# Altium PCB PCB_Wheelchair-Radar_2_2024-08-22.pcbdoc
Units mil, origin at the board's own origin, x right, y up, seen from the top; angles counter-clockwise.
Board outline 4740 x 3815 mil, 2 copper layers (Top Layer, Bottom Layer); 58 components, 58 nets, 247 pads, 88 vias.
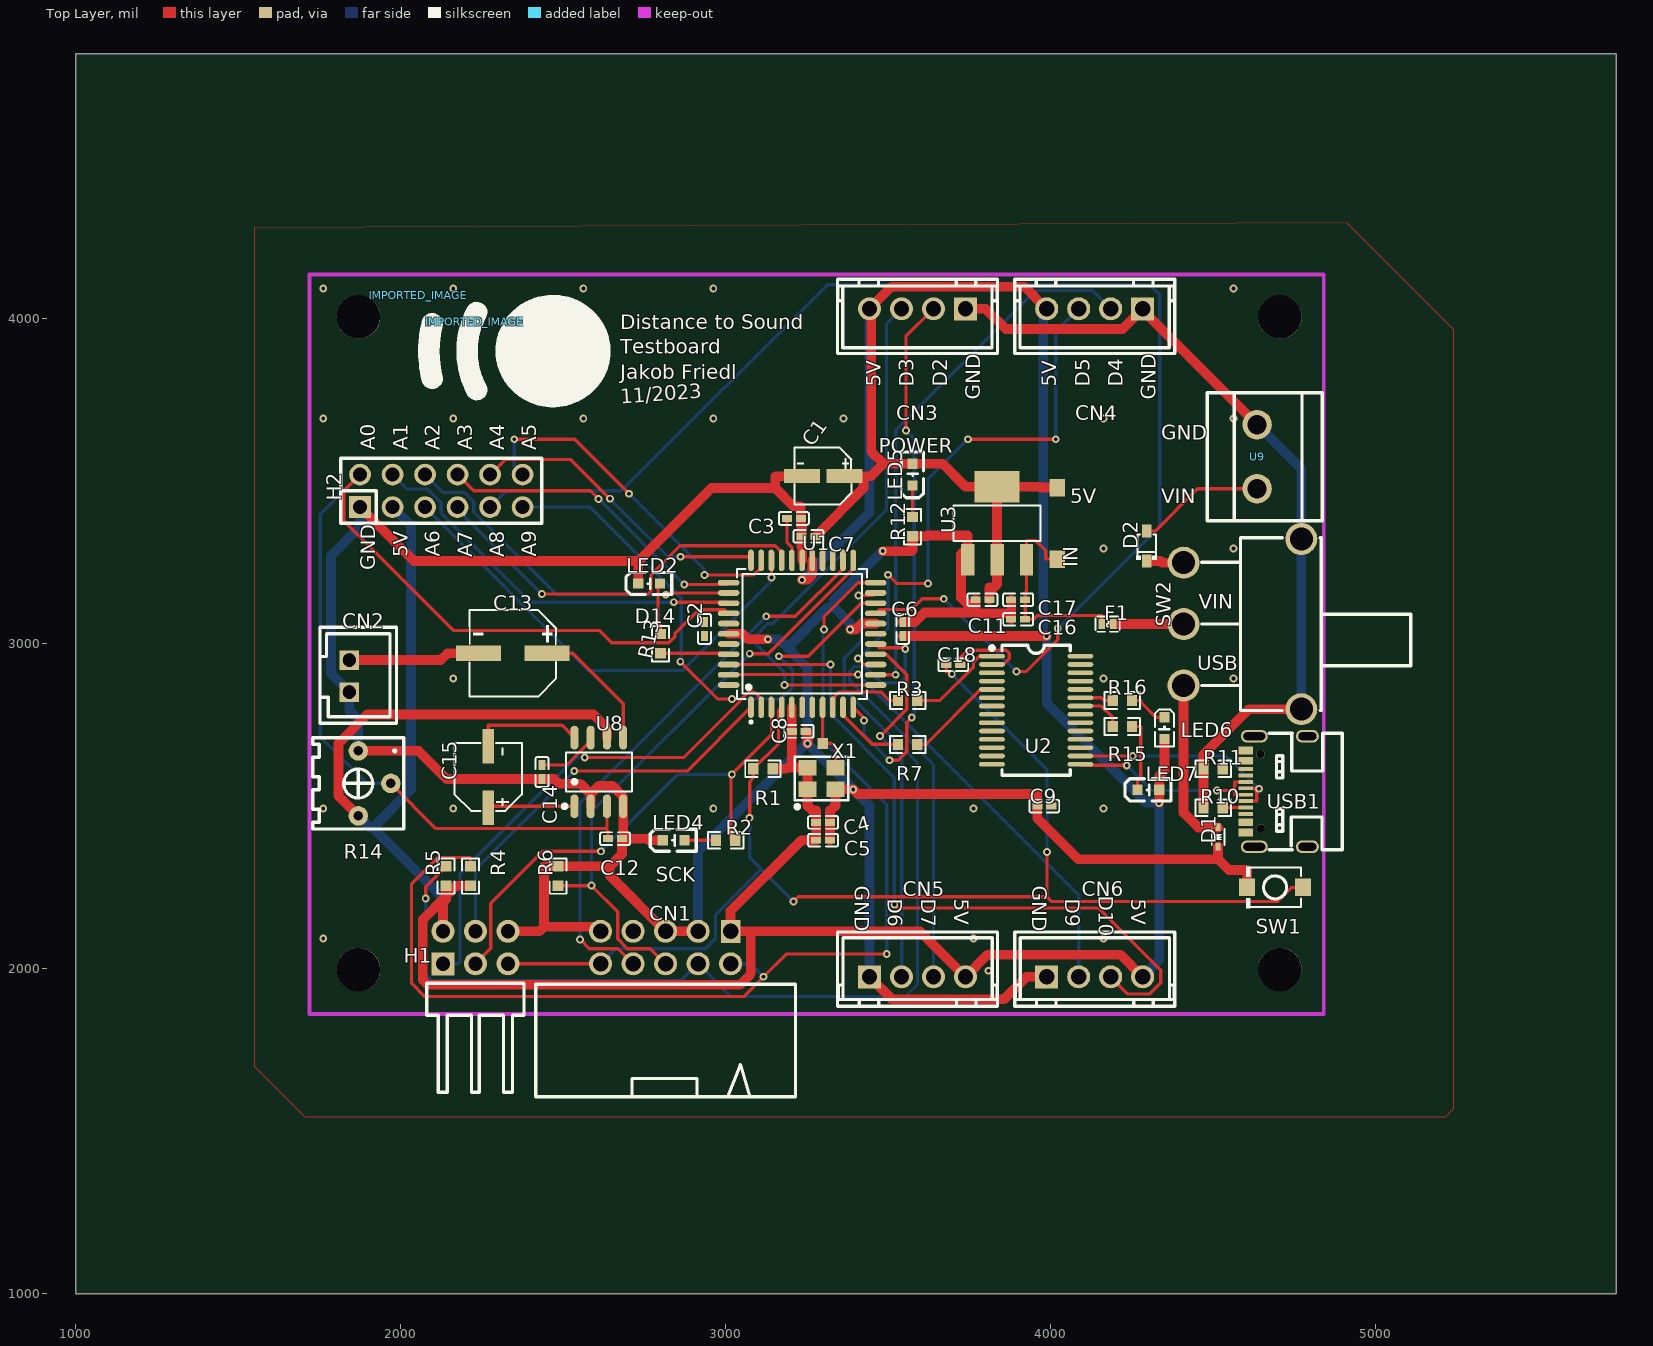
[diagram p0: Top Layer view]
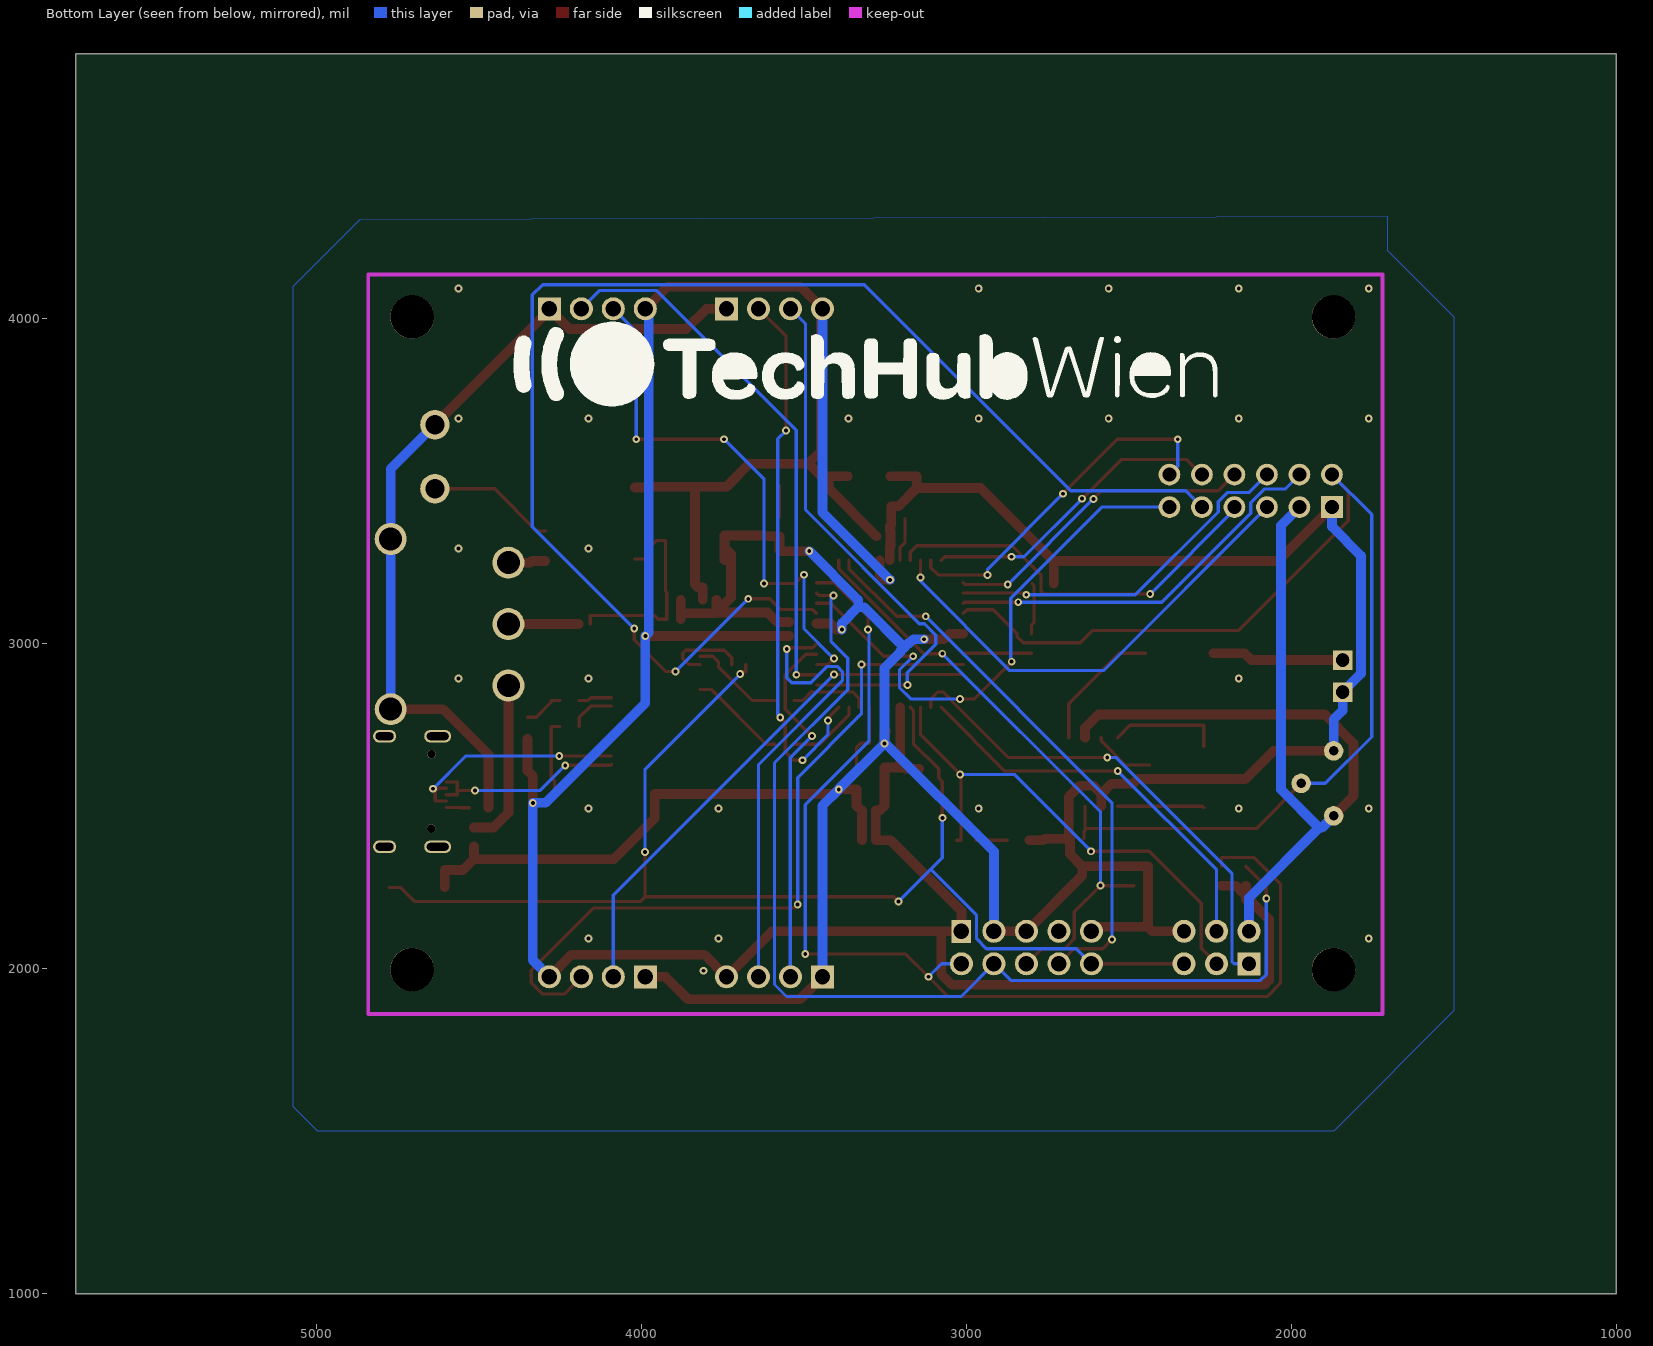
[diagram p1: Bottom Layer view, seen from below]

## Layer stack, top to bottom
Top Layer: signal copper (thickness not stored)
Dielectric: dielectric 12.6, FR-4, Dk 4.8
Bottom Layer: signal copper (thickness not stored)

## Board outline
5740,1000 1000,1000 1000,4815 5740,4815

## Components (designator, comment, footprint, x,y, rotation, side; value= is the part's Value field where it differs from the comment)
C1 "4.7uF" CAP-SMD_BD4.0-L4.3-W4.3-FD 3299.64,3515 r180 top
C2 "1uF" C0402 2934.64,3045 r90 top
C3 "100nF" C0402 3209.64,3385 r180 top
C4 "10uF" C0402 3299.64,2450 r180 top
C5 "100nF" C0402 3299.64,2395 r180 top
C6 "1uF" C0402 3544.64,3045 r270 top
C7 "1uF" C0402 3254.64,3330 r0 top
C8 "1uF" C0402 3224.64,2730 r180 top
C9 "100nF" C0402 3980,2500 r0 top
C11 "1uF" C0402 3789.64,3135 r0 top
C12 "100nF" C0402 2659.64,2400 r180 top
C13 "220uF" CAP-SMD_BD6.3-L6.6-W6.6-FD 2344.64,2970 r180 top
C14 "100nF" C0402 2434.64,2605 r90 top
C15 "10uF" CAP-SMD_BD5.0-L5.3-W5.3-LS6.3-FD 2269.64,2590 r90 top
C16 "100nF" C0402 3899.64,3075 r0 top
C17 "1uF" C0402 3899.64,3135 r0 top
C18 "100nF" C0402 3700,2935 r0 top
CN1 "300R-10P" IDC-TH_300R-10P 2815,2065 r180 top
CN2 "WAFER-XH2.54-2PZZ" CONN-TH_XH2.54-2P 1842.14,2900 r270 top
CN3 "XH-4AK" CONN-TH_XH-4AK 3590,4030 r180 top
CN4 "XH-4AK" CONN-TH_XH-4AK 4135,4030 r180 top
CN5 "XH-4AK" CONN-TH_XH-4AK 3590,1975 r0 top
CN6 "XH-4AK" CONN-TH_XH-4AK 4135,1975 r0 top
D1 "LESD5D5.0CT1G" SOD-523_L1.2-W0.8-LS1.6-BI 4514.64,2405 r90 top
D2 "1N5819WS" SOD-323_L1.8-W1.3-LS2.5-RD 4295,3300 r90 top
F1 "JFC0402-0500FS" F0402 4174.64,3060 r0 top
H1 "PZ254-2-03-W-8.5" HDR-TH_6P-P2.54-H-M-R2-C3-S2.54-W12.3-N 2230,2065 r0 top
H2 "PM254V-12-12-H85" HDR-TH_12P-P2.54-V-F-R2-C6-S2.54 2125,3470 r0 top
IMPORTED_IMAGE "IMPORTED_IMAGE" IMPORTED_IMAGE 2227.32,3989.76 r0 top
IMPORTED_IMAGE "IMPORTED_IMAGE" IMPORTED_IMAGE 2054.78,4072.34 r0 top
LED2 "SZYY0603W" LED0603-R-RD_WHITE 2764.64,3185 r0 top
LED4 "SZYY0603Y" LED0603-R-RD-YELLOW 2839.64,2395 r0 top
LED5 "SZYY0603G" LED0603-R-RD_GREEN 3574.64,3520 r90 top
LED6 "R" LED0603-R-RD 4350,2740 r270 top
LED7 "G" LED0603-R-RD_GREEN 4300,2550 r0 top
R1 "1kΩ" R0603 3114.64,2615 r180 top
R2 "1kΩ" R0603 2999.64,2395 r0 top
R3 "1kΩ" R0603 3559.64,2825 r0 top
R4 "10kΩ" R0603 2214.64,2285 r90 top
R5 "10kΩ" R0603 2139.64,2285 r90 top
R6 "10kΩ" R0603 2484.64,2285 r90 top
R7 "1kΩ" R0603 3559.64,2690 r0 top
R10 "5.1kΩ" R0603 4499.64,2495 r0 top
R11 "5.1kΩ" R0603 4499.64,2615 r0 top
R12 "1kΩ" R0603 3574.64,3360 r90 top
R13 "1kΩ" R0603 2799.64,3000 r270 top
R14 "10kΩ" RES-ADJ-TH_3362P 1919.64,2570 r270 top
R15 "1kΩ" R0603 4220,2745 r0 top
R16 "1kΩ" R0603 4220,2825 r0 top
SW1 "TS-1088-AR02016" SW-SMD_L3.9-W3.0-P4.45 4690,2250 r180 top
SW2 "SS-12D11L7" SW-TH_XKB_SS-12D11L7 4589.64,3060 r90 top
U1 "ATMEGA32A-AU" TQFP-44_L10.0-W10.0-P0.80-LS12.0-BL 3235,3030 r0 top
U2 "FT232RL-REEL" SSOP-28_L10.2-W5.3-P0.65-LS7.8-BL 3955,2795 r270 top
U3 "AZ1117CH-5.0TRG1" SOT-223_L6.5-W3.5-P2.30-LS7.0-BR 3834.64,3370 r270 top
U8 "LM386G-S08-R" SOP-8_L4.9-W3.9-P1.27-LS6.0-BL 2609.64,2605 r0 top
U9 "XY126V-5.0-2P" CONN-TH_XY126V-5.0-2P 4634.64,3575 r90 top
USB1 "TYPEC-304-ACP16" USB-C-SMD_TYPE-C-16P-1 4694.64,2545 r90 top
X1 "16MHz" OSC-SMD_4P-L3.2-W2.5-BL_SIT8008BI 3294.64,2585 r0 top

## Footprints (in the part's own frame and the unit in brackets; to place one, negate y for a bottom-side part, rotate by r counter-clockwise, add the part's x,y. Pads: shape width x height; smd on the part's side, far side on the other; paste and mask are expansions set on the pad)
C0402 [mm]
  rect 0.79x0.54 smd paste-100 mask+0.051: 1(-0.545,0) 2(0.545,0)
  silkscreen extent -1.17,-0.5 1.17,0.5
CAP-SMD_BD4.0-L4.3-W4.3-FD [mm]
  rect 2.8x1.1 smd paste+0 mask+0.051: 1(-1.66,0) 2(1.66,0)
  silkscreen extent -2.22,-2.23 2.24,2.23
CAP-SMD_BD5.0-L5.3-W5.3-LS6.3-FD [mm]
  rect 2.7x0.91 smd paste+0 mask+0.051: 1(-2.4,0) 2(2.4,0)
  silkscreen extent -2.66,-2.62 2.66,2.65
CAP-SMD_BD6.3-L6.6-W6.6-FD [mm]
  rect 3.5x1.2 smd paste+0 mask+0.051: 1(-2.67,0) 2(2.67,0)
  silkscreen extent -3.38,-3.38 3.38,3.38
CONN-TH_XH2.54-2P [mil]
  rect 60x60 hole 39.37 slot 41.34 at 0 deg paste+0 mask+1.97: 1(-49.22,0) 2(49.21,0)
  silkscreen extent -150,-90 145,145
CONN-TH_XH-4AK [mm]
  rect 1.8x1.8 hole 1.2 paste+0 mask+0.051: 1(-3.75,0)
  round 1.8 hole 1.2 paste+0 mask+0.051: 2(-1.25,0) 3(1.25,0) 4(3.75,0)
  silkscreen extent -6.25,-2.3 6.25,3.5
CONN-TH_XY126V-5.0-2P [mm]
  round 2.3 hole 1.5 paste+0 mask+0.051: 1(-2.5,0) 2(2.5,0)
  silkscreen extent -5,-5.1 5,3.9
F0402 [mm]
  rect 0.5x0.8 smd paste+0 mask+0.051: 1(-0.45,0) 2(0.45,0)
  silkscreen extent -0.95,-0.6 0.95,0.6
HDR-TH_6P-P2.54-H-M-R2-C3-S2.54-W12.3-N [mm]
  rect 1.778x1.8 hole 1.1 paste+0 mask+0.051: 1(-2.54,-1.27)
  round 1.8 hole 1.1 paste+0 mask+0.051: 2(-2.54,1.27) 3(0,-1.27) 4(0,1.27) 5(2.54,-1.27) 6(2.54,1.27)
  silkscreen extent -3.8,-11.3 3.8,-2.8
HDR-TH_12P-P2.54-V-F-R2-C6-S2.54 [mm]
  rect 1.7x1.7 hole 1.1 paste+0 mask+0.051: 1(-6.35,-1.27)
  round 1.7 hole 1.1 paste+0 mask+0.051: 2(-6.35,1.27) 3(-3.81,-1.27) 4(-3.81,1.27) 5(-1.27,-1.27) 6(-1.27,1.27) 7(1.27,-1.27) 8(1.27,1.27) 9(3.81,-1.27) 10(3.81,1.27) 11(6.35,-1.27) 12(6.35,1.27)
  silkscreen extent -7.85,-2.54 7.85,2.54
IDC-TH_300R-10P [mm]
  rect 1.524x1.8 hole 1.2 paste+0 mask+0.051: 1(-5.08,-1.27)
  round 1.8 hole 1.2 paste+0 mask+0.051: 2(-5.08,1.27) 3(-2.54,-1.27) 4(-2.54,1.27) 5(0,-1.27) 6(0,1.27) 7(2.54,-1.27) 8(2.54,1.27) 9(5.08,-1.27) 10(5.08,1.27)
  silkscreen extent -10.15,2.87 10.15,11.68
IMPORTED_IMAGE [mil]
LED0603-R-RD [mm]
  rect 0.8x0.8 smd paste+0 mask+0.051: 1(0.851,0) 2(-0.851,0)
  silkscreen extent -1.44,-0.75 1.44,0.75
LED0603-R-RD-YELLOW [mm]
  rect 0.8x0.8 smd paste+0 mask+0.051: 1(0.851,0) 2(-0.851,0)
  silkscreen extent -1.82,-0.86 1.77,0.86
LED0603-R-RD_GREEN [mm]
  rect 0.8x0.8 smd paste+0 mask+0.051: 1(0.851,0) 2(-0.851,0)
  silkscreen extent -1.82,-0.86 1.77,0.86
LED0603-R-RD_WHITE [mm]
  rect 0.8x0.8 smd paste+0 mask+0.051: 1(0.851,0) 2(-0.851,0)
  silkscreen extent -1.82,-0.86 1.77,0.86
OSC-SMD_4P-L3.2-W2.5-BL_SIT8008BI [mm]
  rect 1.4x1.2 smd paste+0 mask+0.051: 1(-1.1,-0.85) 2(1.1,-0.85) 3(1.1,0.85) 4(-1.1,0.85)
  silkscreen extent -2.1,-2.35 2.1,1.7
R0603 [mil]
  rect 31.75x34.02 smd paste-3937.01 mask+2: 1(-29.66,0) 2(29.65,0)
  silkscreen extent -55,-26 55,26
RES-ADJ-TH_3362P [mil]
  round 60 hole 30 paste+0 mask+2: 1(-100,-50) 2(0,50) 3(100,-50)
  silkscreen extent -140,-190 140,90
SOD-323_L1.8-W1.3-LS2.5-RD [mm]
  rect 1x0.75 smd paste+0 mask+0.051: 1(-1.173,0) 2(1.173,0)
  silkscreen extent -1.08,-0.8 0.9,0.8
SOD-523_L1.2-W0.8-LS1.6-BI [mm]
  rect 0.6x0.4 smd paste+0 mask+0.051: 1(-0.75,0) 2(0.75,0)
  silkscreen extent -0.65,-0.5 0.65,0.5
SOP-8_L4.9-W3.9-P1.27-LS6.0-BL [mm]
  oval 0.63x1.865 smd paste+0 mask+0.051: 1(-1.905,-2.682) 2(-0.635,-2.682) 3(0.635,-2.682) 4(1.905,-2.682) 5(1.905,2.682) 6(0.635,2.682) 7(-0.635,2.682) 8(-1.905,2.682)
  silkscreen extent -2.82,-2.83 2.58,1.52
SOT-223_L6.5-W3.5-P2.30-LS7.0-BR [mm]
  rect 2.465x1.05 smd paste+0 mask+0.051: 1(2.858,-2.3) 2(2.857,0) 3(2.857,2.3)
  rect 2.465x3.54 smd paste+0 mask+0.051: 4(-2.857,0)
  silkscreen extent -1.4,-3.4 1.4,3.4
SSOP-28_L10.2-W5.3-P0.65-LS7.8-BL [mm]
  oval 0.364x2.015 smd paste+0 mask+0.051: 1(-4.225,-3.455) 2(-3.575,-3.455) 3(-2.925,-3.455) 4(-2.275,-3.455) 5(-1.625,-3.455) 6(-0.975,-3.455) 7(-0.325,-3.455) 8(0.325,-3.455) 9(0.975,-3.455) 10(1.625,-3.455) 11(2.275,-3.455) 12(2.925,-3.455) 13(3.575,-3.455) 14(4.225,-3.455) 15(4.225,3.455) 16(3.575,3.455) 17(2.925,3.455) 18(2.275,3.455) 19(1.625,3.455) 20(0.975,3.455) 21(0.325,3.455) 22(-0.325,3.455) 23(-0.975,3.455) 24(-1.625,3.455) 25(-2.275,3.455) 26(-2.925,3.455) 27(-3.575,3.455) 28(-4.225,3.455)
  silkscreen extent -5.08,-3.6 5.08,2.67
SW-SMD_L3.9-W3.0-P4.45 [mm]
  rect 1.23x1.36 smd paste+0 mask+0.051: 1(-2.185,0) 2(2.185,0)
  silkscreen extent -2.03,-1.62 2.25,1.62
SW-TH_XKB_SS-12D11L7 [mm]
  round 2.5 hole 1.8 paste+0 mask+0.051: 1(-4.8,4.6) 2(0,4.6) 3(4.8,4.6) 4(6.65,-4.6) 5(-6.65,-4.6)
  silkscreen extent -6.75,-13.15 6.75,3.17
TQFP-44_L10.0-W10.0-P0.80-LS12.0-BL [mm]
  oval 0.448x1.684 smd paste+0 mask+0.051: 1(-4,-5.742) 2(-3.2,-5.742) 3(-2.4,-5.742) 4(-1.6,-5.742) 5(-0.8,-5.742) 6(0,-5.742) 7(0.8,-5.742) 8(1.6,-5.742) 9(2.4,-5.742) 10(3.2,-5.742) 11(4,-5.742) 23(4,5.742) 24(3.2,5.742) 25(2.4,5.742) 26(1.6,5.742) 27(0.8,5.742) 28(0,5.742) 29(-0.8,5.742) 30(-1.6,5.742) 31(-2.4,5.742) 32(-3.2,5.742) 33(-4,5.742)
  oval 1.684x0.448 smd paste+0 mask+0.051: 12(5.742,-4) 13(5.742,-3.2) 14(5.742,-2.4) 15(5.742,-1.6) 16(5.742,-0.8) 17(5.742,0) 18(5.742,0.8) 19(5.742,1.6) 20(5.742,2.4) 21(5.742,3.2) 22(5.742,4) 34(-5.742,4) 35(-5.742,3.2) 36(-5.742,2.4) 37(-5.742,1.6) 38(-5.742,0.8) 39(-5.742,0) 40(-5.742,-0.8) 41(-5.742,-1.6) 42(-5.742,-2.4) 43(-5.742,-3.2) 44(-5.742,-4)
  silkscreen extent -5.08,-6.98 5.08,5.08
USB-C-SMD_TYPE-C-16P-1 [mm]
  rect 0.6x1.15 smd paste-100 mask+0.05: A1B12(-3.2,2.41) A4B9(-2.4,2.41) B1A12(3.2,2.41) B4A9(2.4,2.41)
  rect 0.3x1.15 smd paste-100 mask+0.05: A5(-1.25,2.41) A6(-0.25,2.41) A7(0.25,2.41) A8(1.25,2.41) B5(1.75,2.41) B6(0.75,2.41) B7(-0.75,2.41) B8(-1.75,2.41)
  oval 1x1.8 hole 0.6 slot 1.4 at 90 deg paste+0 mask+0.05: EP(-4.32,-2.41) EP(4.32,-2.41)
  oval 1x2.1 hole 0.6 slot 1.7 at 90 deg paste+0 mask+0.05: EP(-4.32,1.74) EP(4.32,1.74)
  round 0.65 hole 0.65 unplated paste+0: ""(-2.9,1.24) ""(2.9,1.25)
  silkscreen extent -4.55,-5.14 4.55,0.59

## Free pads (board coordinates)
  rect 31.75x34.02 smd paste-3937.01 mask+2: 1(3297.99,2693.04)
  rect 48.42x53.54 smd paste+0 mask+2: 2(4020,3480) 3(4020,3260)
  round 133.86 hole 133.86 unplated paste+0: ""(1870,1997.13) ""(1870,4005) ""(4704.64,1997.13) ""(4704.64,4005)

## Via types
v1: diameter 24.02, hole 12.01, Top Layer to Bottom Layer, tented both sides, 88 vias

## Nets (pads, with @x,y where several pads share a name; then routed paths per layer and width w, separated by ;. In a path a pad name is that pad's centre, name@x,y a point inside that pad or via, vN(x,y) a via of type N, cw(c..) or ccw(c..) an arc to the next point about the centre after c; other vN are vias at no path point)
3V3: C9.2 U2.17
+5V: C1.1 C2.2 C4.2 C5.2 C6.2 C7.2 C8.2 C11.2 CN1.1 CN3.4 CN4.4 CN5.4 CN6.4 H1.2 H2.3 LED5.1 LED6.1 LED7.1 pad.2 R1.1 R4.1 R5.1 R14.3 U1.5 U1.17 U1.27 U1.38 U2.4 U2.20 U3.2 U3.4 U8.6 X1.1 X1.4 | length 13007.7
  Top Layer w29.92: R14.3 1808.61,2531.03 1808.61,2693.28 1897,2781.67 2593.33,2781.67 2634.64,2740.36 U8.6 ; H1.2 2130,2203.04 2139.64,2212.68 2139.64,2223.35 ; R5.1 2139.64,2234.01 ; R4.1 2170.84,2255.34 2149.51,2234.01 2139.64,2234.01 ; R1.1 3186.96,2615 3190.43,2618.47 3203.18,2618.47 ; U1.5 3203.5,2745.04 3203.5,2730.32 C8.2 3203.18,2618.47 ; v1(3234.67,3196.11) 3249.73,3196.11 3266.5,3212.88 U1.27 ; C7.2 3424.14,3478.04 3424.14,3515 ; C1.1 3424.14,3515 ; CN3.4 CN3.4@3447.58,4035.22 ; C6.2 v1(3987.36,3023.54) ; C11.2 3811.1,3172.42 3824.87,3172.42 3834.64,3182.19 3834.64,3219.85 U3.2 U3.4 ; CN4.4 3919.21,4098.15 3510.51,4098.15 CN3.4@3447.58,4035.22 ; pad.2 3969,3480 3966.5,3482.5 U3.4 ; CN6.4 4214.58,2043.06 3805.7,2043.06 CN5.4 3597.64,2115 3071.79,2115 ; v1(4333.5,2510.07) LED7.1 4333.5,2592.54 4350,2609.04 LED6.1 ; 2139.64,2223.35 2068.2,2151.91 2068.2,1965.22 2083.11,1950.31 3043.32,1950.31 3077.27,1984.26 3077.27,2109.52 3071.79,2115 ; 2139.64,2223.35 2139.64,2234.01 ; 3071.79,2115 CN1.1 3015,2177.22 3232.78,2395 C5.2 C4.2 3278.18,2487.42 3265.04,2487.42 3251.33,2501.13 X1.1 X1.4 3203.18,2618.47 ; 3424.14,3515 3446.92,3515 3485.42,3553.5 ; CN3.4@3447.58,4035.22 3447.58,3591.34 3485.42,3553.5 ; 3485.42,3553.5 LED5.1 3667.17,3553.5 3738.17,3482.5 3812.14,3482.5 U3.4
  Bottom Layer w29.92: R14.3 1906.19,2433.45 1914.2,2433.45 ; H2.3 2031.87,3363.13 2031.87,2551.12 1914.2,2433.45 ; H1.2 2130,2217.65 1914.2,2433.45 ; v1(3234.67,3196.11) 3442.36,3403.8 CN3.4 ; CN4.4 3976.59,4019.23 3976.59,3034.31 v1(3987.36,3023.54) 3987.36,2816.95 4294.24,2510.07 v1(4333.5,2510.07) 4333.5,2025.86 CN6.4
A0: C12.2 H2.2 R14.2 U1.37 U8.3 | length 3512.7
  Top Layer w10: H2.2 1824.7,3469.7 1824.7,3378.23 2162.36,3040.57 2611.03,3040.57 2648.88,3002.72 2824.8,3002.72 2844.09,3022.01 2844.09,3031.63 2916.91,3104.45 2997.48,3104.45 U1.37 ; R14.2 2108.58,2431.06 2634.64,2431.06 ; U8.3 2634.64,2431.06 ; C12.2 2638.18,2421.62 2634.64,2425.16 2634.64,2431.06
  Bottom Layer w10: H2.2 1752.42,3397.42 1752.42,2712.7 1895.12,2570 R14.2
A1: H2.4 U1.36 | length 1217.3
  Top Layer w10: v1(2839.97,3127.36) 3006.07,3127.36 U1.36
  Bottom Layer w10: H2.4 2019.52,3475.48 2083.29,3475.48 2125,3433.77 2125,3400.7 2398.5,3127.2 2839.81,3127.2 v1(2839.97,3127.36)
A2: H2.6 U1.35 | length 1108
  Top Layer w10: v1(2815.49,3150.27) 2821.2,3155.98 U1.35
  Bottom Layer w10: H2.6 2130.48,3464.52 2196.88,3464.52 2225,3436.4 2225,3404.77 2479.5,3150.27 v1(2815.49,3150.27)
A3: H2.8 U1.34 | length 976.5
  Top Layer w10: H2.8 2224.96,3470.04 2583.94,3470.04 v1@2608.85,3445.13 ; v1(2872.31,3181.67) 3003.13,3181.67 U1.34
  Bottom Layer w10: v1@2608.85,3445.13 v1(2872.31,3181.67)
  other v1: 2608.85,3445.13
A4: H2.10 U1.33 | length 950
  Top Layer w10: H2.10 2321.06,3566.06 2523.56,3566.06 v1(2643.75,3445.87) ; v1(2860.96,3267.24) 3066.34,3267.24 U1.33
  Bottom Layer w10: v1(2643.75,3445.87) 2822.38,3267.24 v1(2860.96,3267.24)
A5: H2.12 U1.32 | length 1094
  Top Layer w10: v1(2349.29,3628.63) 2535,3628.63 v1(2702.71,3460.92) ; v1(2934.48,3211.28) 3086.64,3211.28 3109.02,3233.66 U1.32
  Bottom Layer w10: v1(2349.29,3628.63) 2349.29,3545.71 H2.12 ; v1(2702.71,3460.92) 2934.48,3229.15 v1(2934.48,3211.28)
A6: H2.5 U1.31 | length 1452
  Top Layer w10: v1(3140.51,3203.76) U1.31
  Bottom Layer w10: H2.5 2577.87,2917.13 2866.11,2917.13 3140.51,3191.53 v1(3140.51,3203.76)
A7: H2.7 U1.30 | length 1236.2
  Top Layer w10: v1(2434.19,3152.41) 2760.82,3152.41 2770.34,3161.93 2770.34,3211.7 2859.32,3300.68 3151.9,3300.68 3172.01,3280.57 U1.30
  Bottom Layer w10: H2.7 2175,3411.6 v1(2434.19,3152.41)
A8/SCL: H2.9 U1.19 | length 4259.7
  Top Layer w10: U1.19 3472.68,3104.61 3570.89,3104.61 3603.99,3137.71 v1(3670.75,3137.71) ; v1(3894.64,2913.82) 3923.69,2913.82 4021.42,3011.55 v1(4021.42,3046.15)
  Bottom Layer w10: H2.9 2325,3470 2679.19,3470 3313.48,4104.29 4303.59,4104.29 4334.91,4072.97 4334.91,3359.64 v1(4021.42,3046.15) ; v1(3670.75,3137.71) v1(3894.64,2913.82)
A9/SDA: H2.11 U1.20 | length 1687.2
  Top Layer w10: v1(2860.26,2944.3) 2974.71,2829.85 v1(3019,2829.85) ; v1(3163.35,2961.14) 3253.96,2961.14 3417.31,3124.49 U1.20
  Bottom Layer w10: H2.11 2582.79,3420 2863.03,3139.76 2863.03,2947.07 v1(2860.26,2944.3) ; v1(3019,2829.85) 3171.17,2829.85 3205.33,2864.01 3205.33,2919.16 v1(3163.35,2961.14)
AREF: C3.2 U1.29 | length 135.3
  Top Layer w10: C3.2 3188.18,3311.61 3203.5,3296.29 U1.29
D0/RX: R3.1 U1.9 | length 246.8
  Top Layer w10: U1.9 3329.49,2830.97 3349.76,2851.24 3476.88,2851.24 3503.12,2825 R3.1
D1/TX: R7.1 U1.10 | length 230.2
  Top Layer w10: U1.10 3360.98,2779.98 3450.96,2690 R7.1
D2/INT0: CN3.2 U1.11 | length 1690.8
  Top Layer w10: U1.11 3425.74,2770.68 v1(3425.74,2762.97) ; v1(3503.68,2641.02) 3530.13,2641.02 3556.92,2667.81 3556.92,2757.11 v1(3572.34,2772.53) ; v1(3554.48,3655.33) 3554.48,3945.27 CN3.2
  Bottom Layer w10: v1(3425.74,2762.97) 3425.74,2718.96 v1(3503.68,2641.02) ; v1(3554.48,3655.33) 3580.07,3629.74 3580.07,2780.26 v1(3572.34,2772.53)
D3/INT1: CN3.3 U1.12 | length 1668
  Top Layer w10: v1(3181.22,2872.52) U1.12
  Bottom Layer w10: v1(3181.22,2872.52) 3181.22,2910.66 3093.83,2998.05 3093.83,3026.21 3128.48,3060.86 3144.38,3060.86 3494.63,3411.11 3494.63,3983.84 CN3.3
D4/OC1B: CN4.2 U1.13 | length 1677.1
  Top Layer w10: U1.13 v1(3522.87,2904.02)
  Bottom Layer w10: v1(3522.87,2904.02) 3522.87,3656.33 3953.08,4086.54 4127.67,4086.54 CN4.2
D5/OC1A: CN4.3 U1.14 | length 1686.9
  Top Layer w10: v1(3407.09,2954.01) 3425.59,2935.51 U1.14 ; v1(3499.51,3211.7) 3526.35,3184.86 v1(3621.92,3184.86) ; v1(3744.89,3628.63) v1(4015.39,3628.63)
  Bottom Layer w10: v1(3407.09,2954.01) 3499.51,3046.43 v1(3499.51,3211.7) ; v1(3621.92,3184.86) 3621.92,3505.66 v1(3744.89,3628.63) ; v1(4015.39,3628.63) 4015.39,3959.6 CN4.3
D6/ICP1: CN5.2 U1.15 | length 1113.4
  Top Layer w10: U1.15 3494.33,2967.01 3556.92,2904.42 3556.92,2797.78 v1(3474.72,2715.58)
  Bottom Layer w10: v1(3474.72,2715.58) 3541.74,2648.56 3541.74,1975.95 CN5.2
D7/OC2: CN5.3 U1.16 | length 1437
  Top Layer w10: U1.16 3472.67,2986.89 3548.95,2986.89 v1(3552.2,2983.64)
  Bottom Layer w10: v1(3552.2,2983.64) 3552.2,2894.83 3536.93,2879.56 3478.26,2879.56 3428.07,2929.75 3396.65,2929.75 3380.92,2914.02 3380.92,2886.1 3639.21,2627.81 CN5.3
D9/AIN1/OC0: CN6.2 U1.43 | length 1609.8
  Top Layer w10: U1.43 3010.18,2905.26 v1(3406.59,2905.26)
  Bottom Layer w10: v1(3406.59,2905.26) 4085.79,2226.06 CN6.2
D10/AIN0/OC0: CN6.3 U1.42 | length 2265
  Top Layer w10: U1.42 v1(3322.58,2935.51) ; v1(3518.68,2197.82) 3530.21,2186.29 4146.99,2186.29 4338.33,1994.95 4338.33,1956.69 4303.54,1921.9 4237.31,1921.9 CN6.3
  Bottom Layer w10: v1(3322.58,2935.51) 3322.58,2784 3518.68,2587.9 v1(3518.68,2197.82)
D11/MOSI: H1.4 U1.1 | length 1243.5
  Top Layer w10: v1(2534.06,2607.93) 2881.51,2607.93 U1.1
  Bottom Layer w10: H1.4 2230,2303.87 v1(2534.06,2607.93)
D12/MISO: H1.1 U1.2 | length 1519.5
  Top Layer w10: v1(2566.27,2649.83) 2871.6,2649.83 3042.06,2820.29 3042.06,2822.01 3071.17,2851.12 3087.19,2851.12 3109.02,2829.29 U1.2
  Bottom Layer w10: H1.1 2175.99,2015 2182.89,2021.9 2182.89,2292.82 2539.9,2649.83 v1(2566.27,2649.83)
D13/SCK: H1.3 R2.2 U1.3 | length 1585.3
  Top Layer w10: H1.3 2277.1,2062.1 2277.1,2200.57 2437.54,2361.01 v1(2616.03,2361.01) ; R2.2 3015.87,2395 3015.87,2594.74 v1(3018.8,2597.67) 3140.51,2719.38 U1.3
  Bottom Layer w10: v1(2616.03,2361.01) 2852.68,2597.66 v1(3018.8,2597.67)
D14/T1: R13.2 U1.41 | length 210.7
  Top Layer w10: R13.2 3005.61,2970.34 U1.41
D+: U2.15 USB1.A6 USB1.B6 | length 615.2
  Top Layer w10: U2.15 4094.33,2625.36 v1(4233.82,2625.36) ; v1(4511.07,2547.71) 4566.06,2547.71 ; USB1.A6 4566.13,2535.15 4566.06,2535.22 4566.06,2547.71 ; USB1.B6 4566.13,2574.52 4566.06,2574.45 4566.06,2547.71
  Bottom Layer w10: v1(4233.82,2625.36) 4311.47,2547.71 v1(4511.07,2547.71)
D-: U2.16 USB1.A7 USB1.B7 | length 702.8
  Top Layer w10: U2.16@4091.03,2654.25 v1@4252.05,2654.25 ; USB1.B7 4616.58,2515.47 4633.39,2515.47 4633.46,2515.54 v1@4633.46,2546.41 ; USB1.A7 4616.58,2554.84 4625.03,2554.84 v1@4633.46,2546.41 ; v1(4640.42,2553.37) v1@4633.46,2546.41
  Bottom Layer w10: v1@4252.05,2654.25 4539.54,2654.25 v1(4640.42,2553.37)
  other v1: 4252.05,2654.25
F1_1: C16.2 C17.2 F1.1 pad.3 U3.3 | length 645
  Top Layer w10: pad.3 3984.8,3260 3984.8,3286.4 3954.19,3317.01 3925.19,3317.01 U3.3 3925.19,3197.99 3925.19,3160.71 3921.1,3156.62 C17.2 C16.2 3947.64,3075 3959.38,3086.74 4156.93,3086.74 F1.1
GND: C1.2 C2.1 C3.1 C4.1 C5.1 C6.1 C7.1 C8.1 C9.1 C11.1 C12.1 C14.1 C16.1 C17.1 CN1.3 CN1.5 CN1.9 CN2.2 CN3.1 CN4.1 CN5.1 CN6.1 D1.1 H1.6 H2.1 LED2.2 LED4.2 R6.2 R10.1 R11.1 R12.1 R14.1 SW1.1 SW2.4 SW2.5 U1.6 U1.18 U1.28 U1.39 U2.7 U2.18 U2.21 U2.25 U3.1 U8.2 U8.4 U9.2 USB1.A1B12 USB1.B1A12 X1.2 | length 13619.4
  Top Layer w29.92: R14.1 2055.15,2670 2141.61,2583.54 C14.1 2472.06,2583.54 2486.47,2569.13 2552.83,2569.13 2584.64,2537.32 ; H2.1 2041.17,3253.83 2731.14,3253.83 ; H1.6 2427.27,2115 2440.84,2128.57 ; U8.2 2584.64,2537.32 ; CN1.9 2601.43,2128.57 2440.84,2128.57 ; LED2.2 2731.14,3227.54 2731.14,3253.83 ; LED4.2 2763.6,2395 2758.6,2400 C12.1@2684.64,2400 ; CN1.3 CN1.5 2643.22,2286.78 2643.22,2314.66 ; U1.39 3052.12,3030 3068.89,3013.23 v1(3129.57,3013.23) ; C1.2 3152.36,3515 3152.36,3478.67 ; U1.28 3235,3296.91 3233.18,3298.73 C7.1 3233.18,3347 3233.75,3347.57 3234.88,3348.7 3234.88,3360.24 3231.1,3364.02 C3.1 3231.1,3422.42 3208.61,3422.42 3152.36,3478.67 ; C8.1 3251.83,2724.27 v1(3251.83,2692.96) ; C5.1 C4.1 3321.1,2487.42 3324.24,2487.42 3337.95,2501.13 X1.2 v1(3392.3,2551.54) 3406.42,2537.42 3958.54,2537.42 3958.54,2508.27 C9.1 3958.54,2462.58 4084.25,2336.87 4514.64,2336.87 ; v1(3382.88,3043.42) 3399.8,3043.42 3401.11,3044.73 3417.88,3061.5 U1.18 ; CN5.1 3511.46,1905.9 3856.04,1905.9 3925.14,1975 CN6.1 ; v1(3482.98,3284.38) 3571.34,3284.38 3574.64,3287.68 R12.1 3618.44,3330.34 3620.91,3332.81 3744.09,3332.81 U3.1@3744.09,3295.16 ; C6.1 3563.35,3066.46 3582.06,3066.46 3611.02,3095.42 3768.18,3095.42 ; CN3.1 3799.86,4030 3862.08,3967.78 4220.42,3967.78 CN4.1@4280.35,4027.71 ; U3.1 U3.1@3744.09,3295.16 ; C11.1 3768.18,3097.58 ; C16.1 3878.18,3093.25 ; C17.1 3878.18,3093.25 ; CN4.1 CN4.1@4280.35,4027.71 ; R10.1 R11.1 4469.98,2636.9 4469.98,2658.8 4609.37,2798.19 SW2.5 ; D1.1 4514.64,2336.87 ; 4603.98,2250 4603.98,2303.56 4547.95,2303.56 4514.64,2336.87 ; U9.2 CN4.1@4280.35,4027.71 ; 2440.84,2128.57 2440.84,2314.66 R6.2 2528.44,2314.66 2643.22,2314.66 ; 2584.64,2537.32 2610.22,2562.9 2650.9,2562.9 2684.64,2529.16 U8.4 C12.1@2684.64,2400 ; 2643.22,2314.66 2681.1,2352.54 2681.1,2362.58 C12.1 C12.1@2684.64,2400 ; 2731.14,3253.83 2955.98,3478.67 3152.36,3478.67 ; U3.1@3744.09,3295.16 3724,3275.07 3724,3141.76 3768.18,3097.58 ; 3768.18,3095.42 3770.35,3093.25 3878.18,3093.25 ; 3768.18,3095.42 3768.18,3097.58
  Bottom Layer w29.92: R14.1 1869.64,2766.5 1842.14,2794 CN2.2 1785.34,2907.59 1785.34,3270.09 1875,3359.75 H2.1 ; CN1.3 2915,2360.2 3247.76,2692.96 v1(3251.83,2692.96) ; v1(3129.57,3013.23) 3163.35,3013.23 3176.64,2999.94 3179.43,2999.94 3190.81,2988.57 ; v1(3382.88,3043.42) 3382.88,3061.83 3332.68,3112.03 ; CN5.1 3442.36,2501.48 v1(3392.3,2551.54) 3392.3,2552.49 v1(3251.83,2692.96) ; v1(3482.98,3284.38) 3332.68,3134.08 3332.68,3112.03 ; U9.2 4770.74,3537.32 SW2.4 SW2.5 ; 3190.81,2988.57 3202.15,2977.22 3202.15,2974.43 3251.83,2924.75 v1(3251.83,2692.96) ; 3190.81,2988.57 3314.27,3112.03 3332.68,3112.03
  other v1: 3808.8,1993.65 1761.85,2092.8 3761.84,2092.8 4161.84,2092.8 1761.85,2492.8 2161.85,2492.8 2961.85,2492.8 3761.84,2492.8 4161.84,2492.8 2161.85,2892.79 4161.84,2892.79 4561.84,2892.79 4161.84,3292.79 4561.84,3292.79 1761.85,3692.79 2161.85,3692.79 2561.85,3692.79 2961.85,3692.79 3361.85,3692.79 4161.84,3692.79 4561.84,3692.79 1761.85,4092.79 2161.85,4092.79 2561.85,4092.79 2961.85,4092.79 4561.84,4092.79
JTAG_TCK: CN1.4 R5.2 U1.21 | length 3327.9
  Top Layer w10: v1(2076.93,2215.84) 2076.93,2251.95 R5.2 ; v1(3408.5,3148.31) 3453.39,3148.31 U1.21
  Bottom Layer w10: v1(2076.93,2215.84) 2076.93,1981.88 2095.17,1963.64 2863.64,1963.64 CN1.4 3015.72,1914.28 3553.02,1914.28 3590,1951.26 3590,2632.91 3364.86,2858.05 3364.86,2955.2 3415.79,3006.13 3415.79,3141.02 v1(3408.5,3148.31)
JTAG_TDI: CN1.8 U1.24 | length 1748.2
  Top Layer w10: v1(2551.8,2089.77) 2580.08,2061.49 2668.51,2061.49 CN1.8 ; v1(3124.7,3083.92) 3214.44,3083.92 3360.98,3230.46 U1.24
  Bottom Layer w10: v1(2551.8,2089.77) 2551.8,2511.02 v1(3124.7,3083.92)
JTAG_TDO: CN1.6 R6.1 U1.23 | length 1846.5
  Top Layer w10: R6.1 v1(2587.01,2255.34) 2667.81,2174.54 2667.81,2091.35 2697.63,2061.53 2768.47,2061.53 CN1.6 ; v1(3073.67,2969.01) 3130.78,2969.01 3392.48,3230.71 U1.23
  Bottom Layer w10: v1(2587.01,2255.34) 2587.01,2482.35 v1(3073.67,2969.01)
JTAG_TMS: CN1.2 R4.2 U1.22 | length 3520.2
  Top Layer w10: R4.2 2214.64,2341.52 2214.57,2341.59 2114.48,2341.59 2033.45,2260.56 2033.45,1955 2074.31,1914.14 3055.4,1914.14 v1(3116.26,1975) 3186.23,2044.97 v1(3495.23,2044.97) ; v1(3302.32,3042.89) 3302.32,3082.96 3406.84,3187.48 U1.22
  Bottom Layer w10: CN1.2 3076.26,2015 v1(3116.26,1975) ; v1(3302.32,3042.89) 3299.52,3040.09 3299.52,2699.27 3495.23,2503.56 v1(3495.23,2044.97)
LED2_1: LED2.1 R13.1 | length 161.2
  Top Layer w10: LED2.1 2791.8,3178.66 2791.8,3064.36 2799.64,3056.52 R13.1
LED4_1: LED4.1 R2.1 | length 96.8
  Top Layer w10: LED4.1 R2.1
LED5_2: LED5.2 R12.2 | length 96.8
  Top Layer w10: R12.2 LED5.2
LED6_2: LED6.2 R16.2 | length 124.5
  Top Layer w10: R16.2 4276.52,2825 4276.52,2820.24 4323.26,2773.5 LED6.2
LED7_2: LED7.2 R15.2 | length 226
  Top Layer w10: R15.2 4276.52,2745 4276.52,2586.76 4266.5,2576.74 LED7.2
RESET: C18.1 CN1.10 H1.5 R1.2 SW1.2 U1.4 | length 4081.8
  Top Layer w10: H1.5 CN1.10 ; v1(3073.6,2463.93) 3073.6,2575.62 3084.98,2587 R1.2 3162.43,2692.45 3162.43,2794.36 U1.4 ; v1(3208.63,2206.39) 3223.12,2220.88 3988.03,2220.88 ; C18.1 3678.54,2913.38 3688.18,2913.38 v1(3695.54,2906.02) ; v1(3988.03,2358.77) 3988.03,2220.88 ; 4776.02,2250 4740.82,2250 4697.21,2206.39 4002.52,2206.39 3988.03,2220.88
  Bottom Layer w10: CN1.10 2661.49,2061.49 2937.87,2061.49 2968.16,2091.78 2968.16,2163.88 3109.65,2305.37 ; v1(3073.6,2463.93) 3073.6,2341.42 3109.65,2305.37 ; v1(3208.63,2206.39) 3109.65,2305.37 ; v1(3695.54,2906.02) 3988.03,2613.53 v1(3988.03,2358.77)
RX: R3.2 U2.1 | length 295.1
  Top Layer w10: R3.2 3658.94,2825 3762.46,2928.52 3762.46,2943.75 3780.05,2961.34 U2.1
SPEAKER+: C13.2 CN2.1 | length 406
  Top Layer w29.92: CN2.1 2123.05,2949.21 2143.84,2970 C13.2
TX: R7.2 U2.5 | length 299.7
  Top Layer w10: R7.2 3616.16,2690 3785.14,2858.98 U2.5
U2_2: C18.2 U2.2 | length 262.8
  Top Layer w10: C18.2 3721.46,2956.62 3744.4,2979.56 3863.5,2979.56 3872.01,2971.05 3872.01,2954.03 3853.73,2935.75 U2.2@3818.97,2935.75
U2_22: R15.1 U2.22 | length 141.7
  Top Layer w10: U2.22 4155.55,2807.79 4190.34,2773 R15.1
U2_23: R16.1 U2.23 | length 102.8
  Top Layer w10: U2.23 4155.09,2833.39 4163.48,2825 R16.1
U8_1: C15.1 U8.1 | length 266.6
  Top Layer w10: C15.1 2273.52,2499.39 U8.1
U8_5: C13.1 U8.5 | length 403.5
  Top Layer w10: C13.1 2529.65,2970 2684.64,2815.01 U8.5
U8_7: C14.2 U8.7 | length 190.6
  Top Layer w10: C14.2 2510.29,2626.46 2584.64,2700.81 U8.7
U8_8: C15.2 U8.8 | length 344.9
  Top Layer w10: C15.2 2269.64,2748.63 2496.62,2748.63 U8.8
U9_1: D2.2 U9.1 | length 393.7
  Top Layer w10: D2.2 4320.75,3346.17 4451.15,3476.57 U9.1
USB1_A5: R10.2 USB1.A5 | length 70.8
  Top Layer w10: R10.2 4556.16,2495 4556.94,2495.78 USB1.A5
USB1_B5: R11.2 USB1.B5
VCC: F1.2 SW2.2 | length 216.2
  Top Layer w29.92: F1.2 4193.58,3060 SW2.2
VIN: D2.1 SW2.3 | length 115.6
  Top Layer w29.92: D2.1 4336.55,3253.84 4341.41,3248.98 SW2.3
VUSB: D1.2 SW2.1 USB1.A4B9 USB1.B4A9 | length 516.1
  Top Layer w29.92: SW2.1 4408.54,2479.7 4453.71,2434.53 D1.2
XTAL1: pad.1 U1.8 X1.3 | length 217.8
  Top Layer w10: U1.8 pad.1 3324.85,2693.04 3337.95,2679.94 X1.3
pads on no net: CN1.7 U1.7 U1.25 U1.26 U1.40 U1.44 U2.3 U2.6 U2.8 U2.9 U2.10 U2.11 U2.12 U2.13 U2.14 U2.19 U2.24 U2.26 U2.27 U2.28 USB1. USB1.A8 USB1.B8 USB1.EP

## Polygon pours and split planes (outlines as drawn)
GND on Bottom Layer (solid): 1705,4315 1705,4210 1500,4005 1500,1870 1870,1500 4995,1500 5070,1575 5070,4100 4865,4305
GND on Top Layer (solid): 1550,4280 1550,1700 1705,1545 5215,1545 5240,1570 5240,3965 4910,4295

## Silkscreen, mask and mechanical layers (free items; w line width, h text height)
Top Overlay:
  text "Distance to Sound" at 2675,3967.5 h45
  text "Testboard" at 2675,3891.53 h45
  text "Jakob Friedl" at 2675,3813.47 h45
  text "5V" at 3477.5,3790 h45 r90
  text "D3" at 3579.17,3790 h45 r90
  text "D2" at 3680.83,3790 h45 r90
  text "5V" at 4017.5,3790 h45 r90
  text "D5" at 4119.17,3790 h45 r90
  text "D4" at 4220.83,3790 h45 r90
  text "GND" at 3782.5,3749.9 h45 r90
  text "GND" at 4322.5,3749.9 h45 r90
  text "11/2023" at 2676.57,3737.55 h45 r4
  text "GND" at 4340,3627.5 h45
  text "A0" at 1922.5,3595 h45 r90
  text "A1" at 2021.5,3595 h45 r90
  text "A2" at 2120.5,3595 h45 r90
  text "A3" at 2219.5,3595 h45 r90
  text "A4" at 2318.5,3595 h45 r90
  text "A5" at 2417.5,3595 h45 r90
  text "POWER" at 3470,3587.5 h45
  text "5V" at 4060,3432.5 h45
  text "VIN" at 4340,3432.5 h45
  text "A6" at 2120.5,3267.2 h45 r90
  text "A9" at 2417.5,3267.2 h45 r90
  text "5V" at 2021.5,3265.1 h45 r90
  text "A7" at 2219.5,3265.1 h45 r90
  text "A8" at 2318.5,3265.1 h45 r90
  text "IN" at 4082.5,3235 h45 r90
  text "GND" at 1922.5,3225 h45 r90
  text "VIN" at 4455,3107.5 h45
  text "D14" at 2719.64,3062.5 h45
  text "USB" at 4450,2917.5 h45
  text "SCK" at 2784.64,2267.5 h45
  text "GND" at 3397.5,2255.1 h45 r270
  text "GND" at 3942.5,2255.1 h45 r270
  text "D10" at 4147.5,2225 h45 r270
  text "D6" at 3499.17,2215 h45 r270
  text "D7" at 3600.83,2215 h45 r270
  text "5V" at 3702.5,2215 h45 r270
  text "D9" at 4044.17,2215 h45 r270
  text "5V" at 4247.5,2215 h45 r270